# Altium PCB УШЯИ 758727.205.PcbDoc (part 2 of 3)
Units mm, origin at the board's own origin, x right, y up, seen from the top; angles counter-clockwise.
Board outline 230 x 150 mm, 2 copper layers (Top Layer, Bottom Layer), stack 1.57 mm thick; 312 components, 192 nets, 1030 pads, 332 vias.
Unrouted connection lines stored in the file: 2.
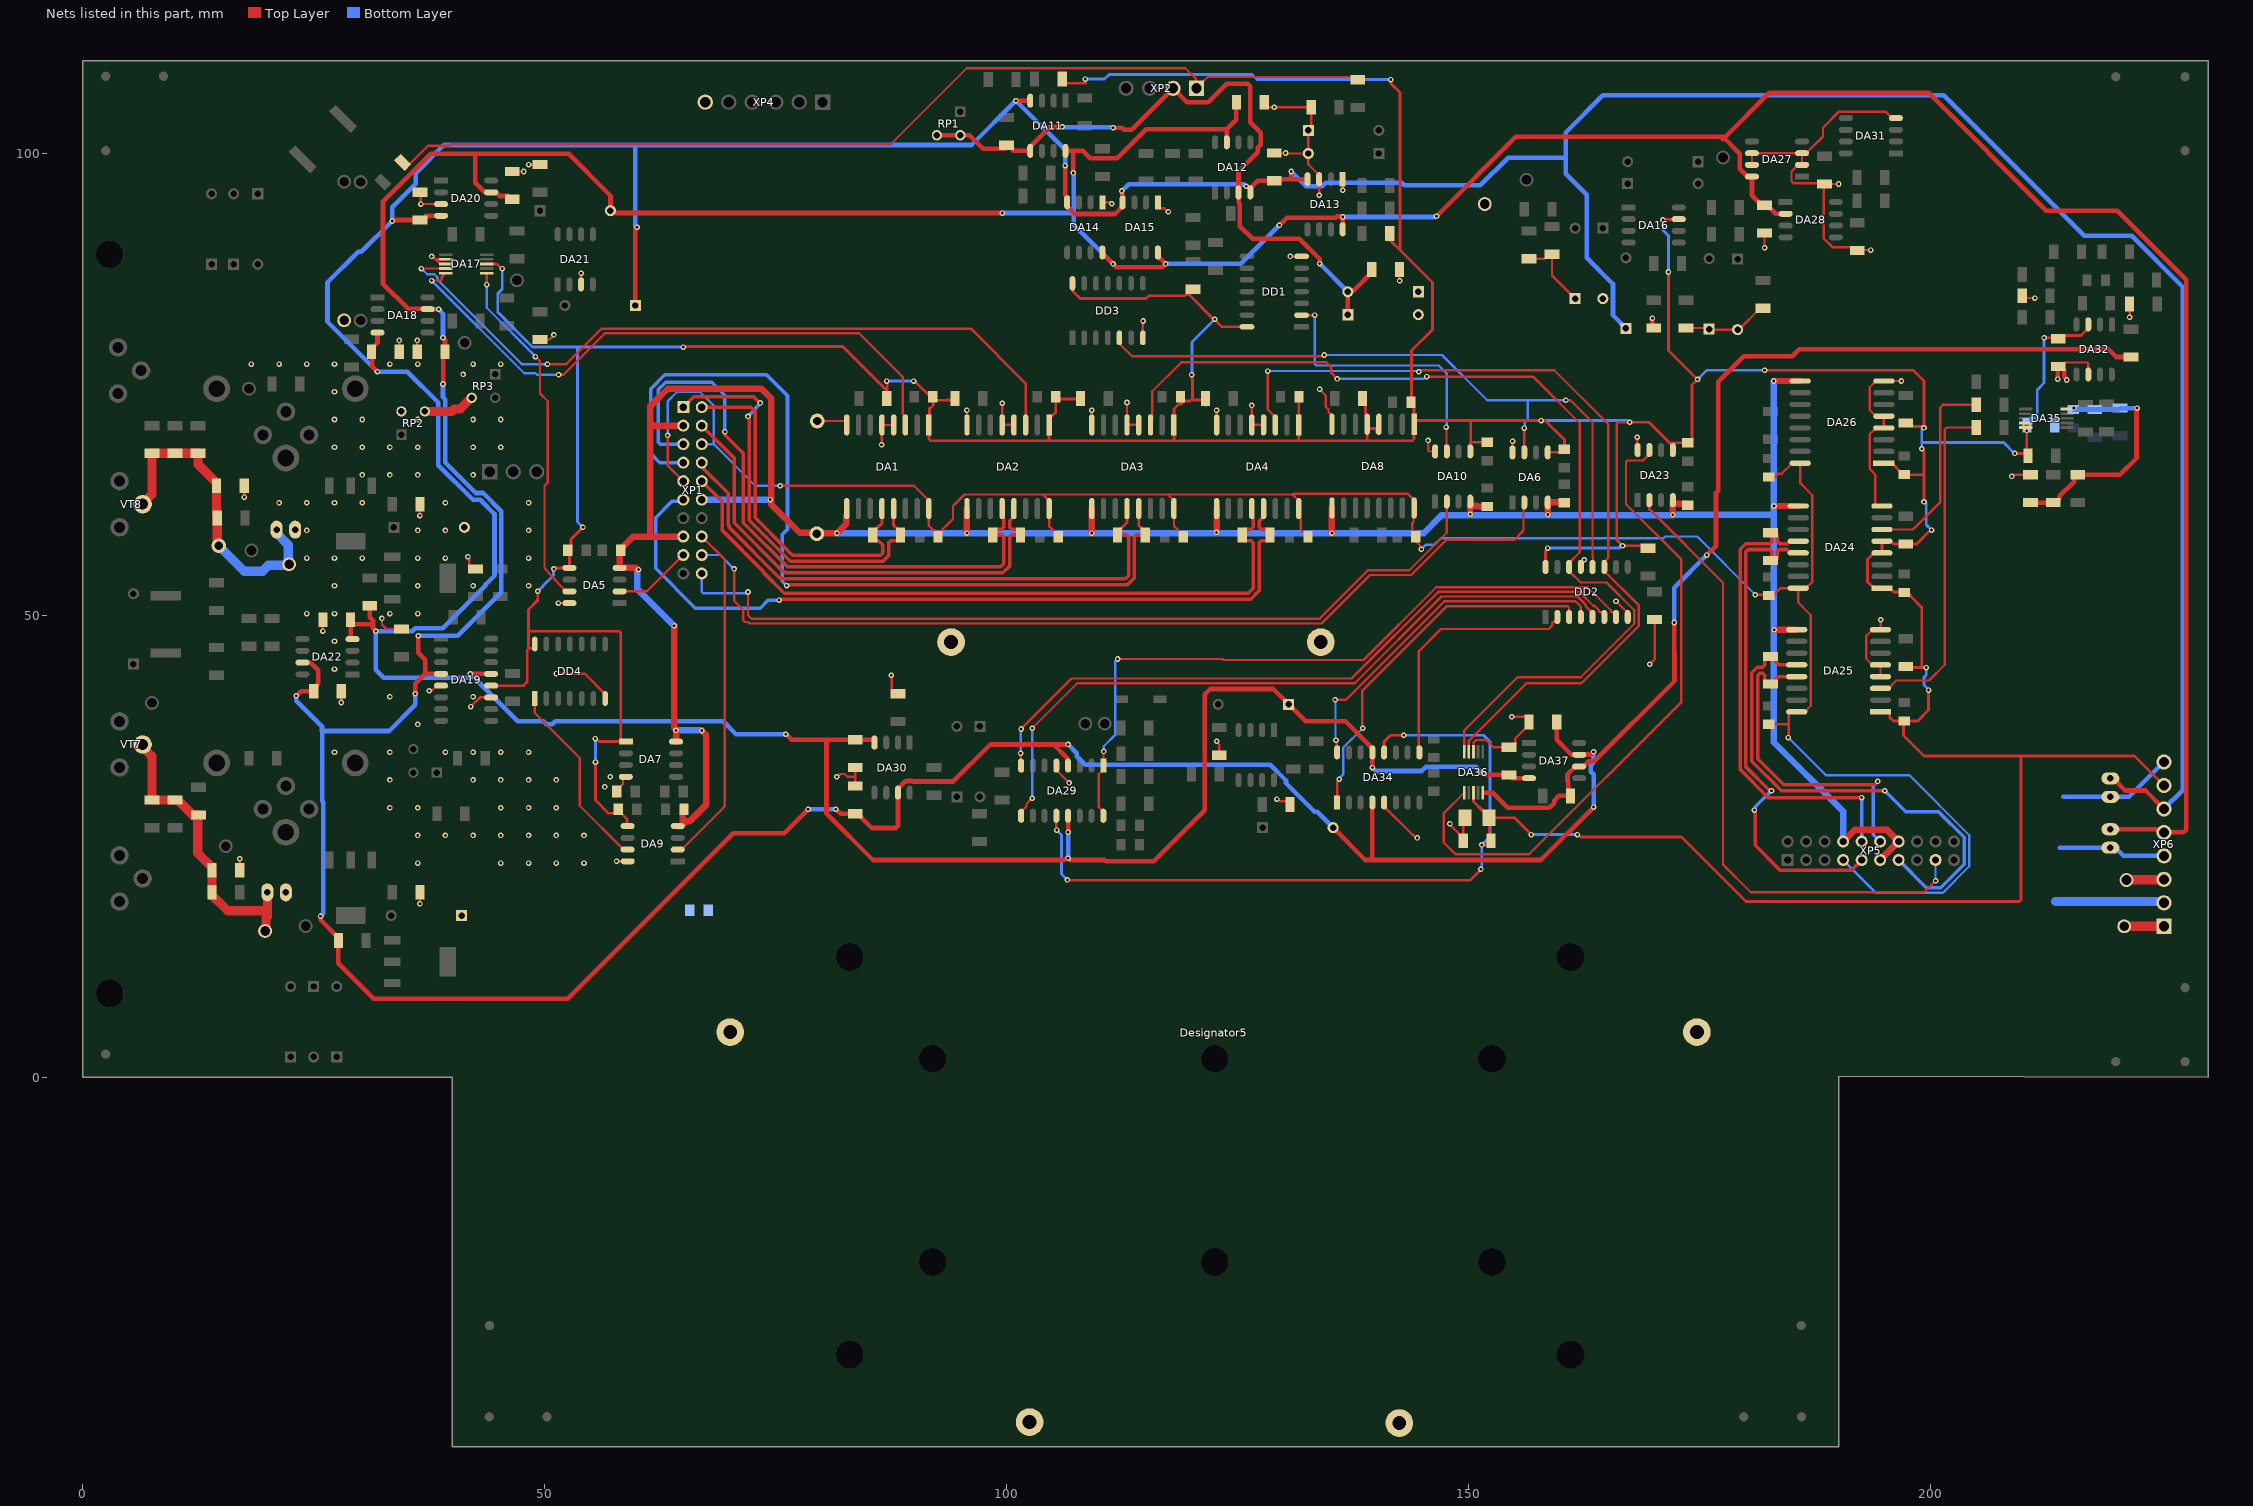
[diagram p2: the nets of this part, all layers, seen from the top]

## Via types
v1: diameter 0.6, hole 0.3, Top Layer to Bottom Layer, 328 vias
v2: diameter 0.5, hole 0.3, Top Layer to Bottom Layer, 3 vias
v3: diameter 1.6, hole 0.9, Top Layer to Bottom Layer, 1 vias

## Nets (pads, with @x,y where several pads share a name; then routed paths per layer and width w, separated by ;. In a path a pad name is that pad's centre, name@x,y a point inside that pad or via, vN(x,y) a via of type N, cw(c..) or ccw(c..) an arc to the next point about the centre after c; other vN are vias at no path point) (continued)
+5: C5.2 C6.2 C7.2 C8.2 C14.1 C15.1 C16.2 C19.1 C20.1 C56.1 C57.2 C58.2 C59.2 C88.1 C94.2 C95.1 C97.1 DA1.1 DA2.1 DA3.1 DA4.1 DA5.5 DA6.5 DA7.1 DA8.1 DA8.4 DA8.5 DA9.5 DA10.5 DA16.7 DA17.8 DA19.12 DA23.5 DA24.1 DA24.4 DA24.5 DA25.1 DA26.1 DA29.12 DA32.3 DA34.12 DA35.9 DA35.10 DA36.8 DD1.14 DD2.16 DD3.14 DD4.14 R5.1 R6.1 R7.1 R8.1 R10.1 R11.2 R19.2 R24.2 R25.1 R60.1 R61.1 R62.1 R88.2 XP6.7 | length 752.8
  Top Layer w0.3: DA17.8@43.725,88 44.666,88 44.693,87.973 44.852,87.973 45.325,87.5 v1(45.406,87.5) ; DA19.12@44.212,42.365 47.706,42.365 48.108,42.767 48.108,46.164 48.363,46.419 ; DD4.14@48.975,46.419 48.363,46.419 ; v1(49.248,52.57) 49.248,51.608 48.245,50.605 48.245,48.25 ; v1(51,54.992) 51.081,54.992 51.2,55.11 DA5.5@52.682,55.11 52.682,56.525 52.657,56.55 52.85,56.743 52.85,58.211 v1(54.139,59.5) ; v1(55.482,36.639) 55.563,36.639 55.888,36.314 58.183,36.314 DA7.1@58.23,36.362 ; v1(55.5,34.099) 55.5,29.972 56.922,28.55 C19.1@58.028,28.55 ; C19.1@57.973,29 57.973,28.875 58.903,27.945 58.903,27.24 DA9.5@58.973,27.17 ; DA7.1@58.788,36.315 58.74,36.362 DA7.1@58.23,36.362 ; v1(65,79) 65.05,79.05 82.254,79.05 87.069,74.235 ; v1(87.015,75.327) 87.069,75.273 87.069,74.235 ; R5.1@87.069,72.782 87.069,74.235 ; v1(89.92,75.327) 89.977,75.27 90.087,75.27 92,73.357 C5.2@92,73.232 ; DA1.1@91.574,70.579 91.574,69.042 91.75,68.865 104.582,68.865 ; DA1.1@91.628,70.579 91.628,72.372 91.705,72.372 92.055,72.722 92.055,72.907 ; C5.2@92.414,73.257 93.459,73.257 93.484,73.282 94.102,73.282 94.452,72.932 R6.1@94.452,72.782 ; C6.2@105.291,73 105.291,71.925 104.944,71.578 104.723,71.578 104.582,71.437 DA2.1@104.582,70.579 104.582,68.865 ; C6.2@105.291,73.019 105.641,73.369 R7.1@107.991,73.369 ; DA29.12@105.365,28.288 105.365,26.793 v1(105.416,26.742) ; R11.2@106.055,107.55 108.555,107.55 108.555,107.945 v1(108.5,108) ; v1(106.566,21.346) 106.612,21.3 150.124,21.3 v1(151.312,22.488) ; DD3.14@107.166,85.45 107.166,85.031 107.948,84.25 115.076,84.25 115.376,84.55 119.254,84.55 119.402,84.699 119.702,84.699 v1@122.497,81.904 ; C7.2@118.799,73.132 118.799,73.007 118.09,72.298 DA3.1@118.09,70.579 118.09,68.92 118.144,68.865 ; 118.853,72.807 119.203,73.157 119.828,73.157 119.953,73.282 120.106,73.282 ; v1(120,76) 120.057,75.943 120.057,75.547 120.106,75.499 120.106,73.282 ; R8.1@121.554,72.682 121.554,72.932 121.204,73.282 120.106,73.282 ; v1(122.5,82) 123.31,81.19 DD1.14@126,81.19 ; DA4.1@131.598,70.129 131.598,68.865 ; DA4.1@131.598,70.579 131.598,72.979 C8.2@131.619,73 ; R10.1@138.536,72.977 138.631,72.977 138.831,72.777 138.831,71.752 139,71.583 DA8.5@139,70.649 DA8.5@139,70.199 ; DA8.4@140.135,69.656 140,69.791 DA8.4@140,70.199 ; DA8.4@140.27,70.649 140.27,70.329 140.14,70.199 DA8.4@140,70.199 ; DA34.12@140.832,35.15 140.832,36.301 141.532,37 v1(142.952,37) ; R19.2@141.5,90.849 141.5,90.549 142.555,89.494 ; v1(141.552,107.948) 141.552,107.553 142.555,106.55 142.555,89.494 ; C16.2@143.749,73.029 143.749,72.634 143.804,72.579 144.055,72.579 144.08,72.554 DA8.1@144.08,71.05 ; C16.2@143.804,73.029 143.804,78.621 146.055,80.872 146.055,85.994 142.555,89.494 ; DA8.1@144.08,70.649 144.08,69.041 143.904,68.865 139,68.865 ; DA8.1@144.08,70.909 144.221,71.05 150.21,71.05 ; DA10.5@150.155,67.712 150.155,68.712 150.21,68.712 ; DA36.8@150.5,30.775 150.5,29.834 151.501,28.833 151.65,28.833 152.2,28.283 C95.1@152.2,28.083 ; v1(151.4,25.133) 152.05,25.133 152.4,25.483 C97.1@152.4,25.583 152.2,25.783 C95.1@152.2,28.083 ; C20.1@152,68.712 150.21,68.712 ; v1(156.75,26.25) 154.917,28.083 C95.1@152.2,28.083 ; DD2.16@158.305,55.25 158.305,56.936 158.538,57.169 v1(158.538,57.25) ; DA6.5@158.538,67.612 160.005,67.612 C15.1@160.338,67.945 160.338,68.968 158.256,71.05 v1(157.811,71.05) 150.21,71.05 ; v1(161.75,26.25) 161.826,26.25 162.076,26 173,26 180,19 209.574,19 209.75,19.176 209.75,34.75 ; R25.1@169.375,57.225 169.1,57.5 v1(166.627,57.5) 166,58.127 166,70.689 166.176,70.865 v1(167.418,70.865) 169.507,70.865 171.722,68.65 ; v1(171,92.75) 171.046,92.796 172.665,92.796 DA16.7@172.712,92.843 ; v1(171.6,87.125) 171.6,78.65 v1(174.75,75.5) 174.143,74.893 174.143,69 C56.1@173.793,68.65 ; DA23.5@172.073,67.862 172.073,68.3 171.722,68.65 ; C56.1@173.668,68.65 171.722,68.65 ; v1(182,76.5) 198.08,76.5 199.25,75.33 v1(199.25,70.258) 199.169,70.258 199.027,70.401 198.152,70.401 197.802,70.751 197.299,70.751 R62.1@197.275,70.775 ; DA25.1@194.536,39.53 195.394,39.53 195.535,39.389 195.535,38.951 195.956,38.53 C57.2@197.031,38.53 ; DA26.1@194.907,66.44 195.765,66.44 196.66,65.545 197.305,65.545 197.655,65.195 199.136,65.195 199.25,65.08 ; C59.2@197.5,52.45 197.45,52.5 195.971,52.5 195.555,52.916 DA24.1@194.698,52.916 193.84,52.916 193.149,53.607 193.149,56.034 193.84,56.726 DA24.4@194.698,56.726 DA24.5@194.698,57.996 195.632,57.996 195.937,57.691 197.666,57.691 R60.1@197.675,57.7 ; C59.2@197.513,52.45 197.826,52.137 197.826,52.025 199,50.851 199,44.32 ; R61.1@197.6,44.45 197.73,44.32 199,44.32 ; 198.168,57.7 198.468,57.7 199.968,59.2 v1(200.074,59.2) ; v1(199,68.001) 199,67.92 199.25,67.67 199.25,65.195 199.25,65.08 ; v1(199.25,62.25) 199.25,65.08 ; v1(199.499,44.32) 199,44.32 ; v1(199.749,41.884) 199.749,39.721 198.578,38.55 197.381,38.55 197.031,38.2 197.031,36.969 199.25,34.75 209.75,34.75 ; v1(209.064,67.5) R88.2@210.25,67.5 ; DA35.9@210.275,70.796 DA35.10@210.275,70.296 210.375,70.296 210.375,67.625 R88.2@210.25,67.5 ; R88.2@210.345,67.595 210.5,67.441 R88.2@210.5,67.25 210.405,67.345 R88.2@210.25,67.5 ; v1(212.25,80) 213.666,80 C88.1@213.768,79.897 214.118,80.247 216.252,80.247 217.029,81.024 DA32.3@217.029,81.462 ; XP6.7@225.209,31.567 222.026,34.75 209.75,34.75 ; 48.245,48.25 48.245,46.419 48.363,46.419 ; 48.245,48.25 58.054,48.25 58.23,48.074 DA7.1@58.23,36.362 ; 104.582,68.865 118.144,68.865 ; 118.144,68.865 131.598,68.865 ; 131.598,68.865 139,68.865 ; 139,68.865 DA8.5@139,70.199 ; DA8.5@139,70.199 DA8.4@140,70.199 ; 150.21,68.712 150.21,71.05
  Bottom Layer w0.3: v1(45.406,87.5) 45.406,85.298 44.925,84.817 44.925,82.796 48.701,79.02 52.624,79.02 52.644,79 63.813,79 v1(65,79) ; v1(49.248,52.57) 49.787,53.109 49.787,53.135 50.943,54.291 50.943,54.934 v1(51,54.992) ; 53.555,78.894 53.555,60.085 v1(54.139,59.5) ; v1(55.5,34.099) v1@55.5,36.622 ; v1(87.015,75.327) v1(89.92,75.327) ; v1(105.416,26.742) 105.416,26.72 105.935,26.201 105.935,21.977 v1(106.566,21.346) ; v1(108.5,108) 110.586,108 111.086,108.5 126.528,108.5 127.08,107.948 v1(141.552,107.948) ; v1@120.055,76 120.055,79.555 v1(122.5,82) ; v1(142.952,37) 151.571,37 152.278,36.292 152.278,26.011 v1(151.4,25.133) v1@151.4,22.576 ; v1(156.75,26.25) v1(161.75,26.25) ; v1(157.811,71.05) 167.151,71.05 167.336,70.865 v1(167.418,70.865) ; v1(158.538,57.25) 166.296,57.25 166.546,57.5 v1(166.627,57.5) ; v1(171,92.75) 171,91.646 171.6,91.046 v1(171.6,87.125) ; v1(174.75,75.5) 175.75,76.5 v1(182,76.5) ; v1(199,68.001) 199,68.689 ; v1(199.25,62.25) 199.5,62 199.5,59.774 v1(200.074,59.2) ; v1(199.25,70.258) 199,70.008 199,68.689 ; v1(199.499,44.32) 199.499,43.52 199.25,43.27 199.25,42.446 199.749,41.946 v1(199.749,41.884) ; v1(209.064,67.5) 207.875,68.689 199,68.689 ; C94.2@210.4,70.55 210.75,70.9 210.75,71.326 211.324,71.326 211.5,71.502 211.5,74.373 212.25,75.123 v1(212.25,80)
  other v2: 210.375,69.95
+5n: C1.2 C2.2 C3.2 C4.2 C10.2 C53.2 C54.2 C55.2 DA1.16 DA2.16 DA3.16 DA4.16 DA8.16 DA24.16 DA25.16 DA26.16 XP1.6 XP1.9 XP5.7 | length 253.8
  Top Layer w0.254: v1(63.3,69.445) 63.3,66.2 XP1.9@65,64.5 ; v1(75.5,64) 89.955,64 91.574,62.381 DA1.16@91.574,61.523 91.574,59.67 92.076,59.168 92.201,59.168 C1.2@92.574,58.795 ; C1.2@92.574,58.67 C1.2@92.574,58.795 ; C2.2@105.582,58.5 105.582,58.625 104.582,59.625 DA2.16@104.582,61.523 104.582,62.381 103.914,63.049 ; C3.2@119.09,58.5 119.09,58.625 118.09,59.625 DA3.16@118.09,61.523 118.09,62.381 117.422,63.049 ; C4.2@132.598,58.5 132.598,58.625 132.225,58.998 132.1,58.998 131.804,59.294 131.804,60.371 131.598,60.577 DA4.16@131.598,61.523 131.598,62.381 130.93,63.049 ; v1(144.873,57.127) 144.807,57.193 144.807,57.443 144.258,57.992 144.258,58.915 143.885,59.288 143.885,59.936 144.017,60.068 144.017,61.53 DA8.16@144.08,61.593 144.08,62.451 143.412,63.119 130.999,63.119 130.93,63.049 ; v1(181,52.207) 182.702,52.207 C53.2@182.788,52.121 ; C54.2@182.74,38.176 184.547,38.176 184.626,38.097 ; C53.2@182.913,52.121 183.708,52.916 DA24.16@185.642,52.916 ; 183.127,64.933 183.5,65.306 183.859,65.306 184.993,66.44 DA26.16@185.851,66.44 185.851,64.278 187.167,62.962 187.167,53.584 186.499,52.916 DA24.16@185.642,52.916 ; v1(184.56,36.75) 184.626,36.816 184.626,38.097 ; C1.2@92.574,58.795 94.181,60.403 94.181,61.815 95.415,63.049 103.914,63.049 ; 103.914,63.049 117.422,63.049 ; 117.422,63.049 130.93,63.049 ; 184.626,38.097 184.626,39.379 184.777,39.53 DA25.16@185.48,39.53 186.338,39.53 187.006,40.198 187.006,49.993 185.641,51.358 DA24.16@185.642,52.916
  Bottom Layer w0.254: v1(63.3,69.445) 63.3,73.127 64.35,74.177 66.775,74.177 68.286,72.666 68.286,68.5 ; XP1.6@67,68.5 68.286,68.5 ; v1(75.5,64) 72.786,64 68.286,68.5 ; v1(144.873,57.127) 145.374,57.627 146.285,57.627 146.98,58.323 171.066,58.323 171.243,58.5 174.707,58.5 v1(181,52.207) ; v1(184.56,36.75) 188.633,32.677 197.668,32.677 204.158,26.187 204.158,22.813 201.287,19.942 194.058,19.942 XP5.7@190.5,23.5
+15: C26.2 C35.1 C42.1 C46.2 C60.1 C67.2 C79.2 C98.1 DA11.8 DA12.7 DA13.8 DA14.8 DA15.8 DA18.7 DA19.4 DA20.7 DA22.7 DA27.8 DA28.2 DA29.4 DA30.7 DA34.4 DA37.7 R42.1 VD10.2 VD25.2 XP6.5 | length 646.8
  Top Layer w0.5: v1(23.121,41.27) 23.181,41.27 23.681,41.77 C42.1@25,41.77 25,42.07 25.5,42.57 25.5,44.035 24.696,44.839 23.814,44.839 DA22.7@23.788,44.865 ; v1(25.75,17.424) 25.769,17.405 25.769,17.009 27.678,15.1 R42.1@27.678,14.8 27.678,12.322 31.5,8.5 52.5,8.5 70.412,26.412 75.912,26.412 v1(78.5,29) ; v1(36,41.5) 36,42.573 37.062,43.635 ; v1(36.323,47.77) 36.304,47.751 36.304,45.926 37.062,45.168 37.062,43.635 ; v1(38.55,83.104) DA18.7@37.33,83.104 37.301,83.133 35.217,83.133 32.5,85.849 32.5,94.719 37.681,99.9 42.5,99.9 ; DA19.4@38.788,43.635 37.062,43.635 ; v1(39,75.005) 39.019,75.025 39.019,78.307 C35.1@39.212,78.5 39.212,79.788 v1(39,80) ; C46.2@46.5,95 46.5,94.926 46.076,95.35 45.139,95.35 44.744,95.745 DA20.7@44.212,95.745 44.183,95.774 43.516,95.774 42.5,96.79 42.5,99.9 ; v1(81.5,29) 81.527,29 82.026,28.501 C79.2@83.595,28.501 83.895,28.501 84.245,28.151 84.245,28.1 85.383,26.962 87.962,26.962 88.23,27.23 DA30.7@88.23,30.789 88.23,31.226 89.004,32 89.107,32 89.158,32.051 89.842,32.051 89.893,32 94.195,32 98.195,36 105.054,36 ; v1(99.5,93.506) 57.764,93.506 57.647,93.622 57.255,93.622 VD10.2@57.121,93.756 57.121,95.379 52.6,99.9 42.5,99.9 ; DA11.8@106.351,100.236 107.196,100.236 ; DA29.4@106.635,33.712 106.606,33.741 106.606,34.448 105.054,36 ; v1(106.635,36) 105.054,36 ; v1(107.196,97.846) 107.196,100.236 ; DA14.8@110.351,89.236 110.351,88.839 110.42,88.77 110.73,88.77 v1(111.5,88) 111.851,87.649 116.844,87.649 v1(117.196,88) 117.172,88 DA15.8@116.351,88.822 ; DA12.7@123.811,101.16 123.811,102.573 ; C26.2@124.851,105.5 124.851,103.613 123.811,102.573 ; v1(129.5,92.174) 130.325,92.999 135.585,92.999 135.716,93.129 136.268,93.129 136.323,93.074 v1(136.351,93.074) ; VD25.2@135.313,27 138.813,23.5 139.562,23.5 ; DA13.8@136.351,91.736 v1@136.351,93.129 ; DA34.4@139.562,29.726 139.562,23.5 ; v1(146.5,93.162) 155.088,101.75 177.77,101.75 ; C98.1@159.5,38.437 159.5,36.5 161.084,34.916 161.909,34.916 DA37.7@161.937,34.888 161.966,34.916 163.177,34.916 163.473,35.213 v1(163.5,35.213) ; v1(163.5,29.224) 157.776,23.5 139.562,23.5 ; DA28.2@184.283,93.42 184.254,93.448 183.197,93.448 182.3,94.345 C67.2@182,94.345 181.7,94.345 180.634,95.412 DA27.8@180.634,97.44 180.196,97.44 179.334,98.303 179.334,99.916 177.77,101.48 177.5,101.48 177.635,101.615 177.77,101.75 ; C60.1@219.415,26.827 224.341,26.827 224.461,26.707 224.989,26.707 XP6.5@225.209,26.487 227.316,26.487 227.609,26.78 227.609,86.282 220.141,93.75 212.5,93.75 199.75,106.5 182.52,106.5 177.77,101.75 ; 107.196,100.236 108.262,100.236 108.29,100.208 109.05,99.448 111.956,99.448 115.081,102.573 123.811,102.573
  Bottom Layer w0.5: v1(23.121,41.27) 23.121,40.73 25.9,37.95 25.9,37.456 33.162,37.456 36,40.294 v1(36,41.5) ; v1(25.75,17.424) 25.75,17.451 26.025,17.726 26.025,29.775 25.95,29.85 25.95,37.456 ; v1(36.323,47.77) 40.596,47.77 45.316,52.49 45.316,61.245 43.347,63.213 42.551,63.213 39.25,66.514 39.25,73.311 39,73.561 v1(39,75.005) ; v1(38.55,83.104) 38.55,83.077 39,82.627 v1(39,80) ; v1(78.5,29) v1(81.5,29) ; v1(99.5,93.506) 107.241,93.506 ; v1(106.635,36) 107.581,35.054 107.581,34.729 108.508,33.802 128.511,33.802 130.211,32.102 130.211,31.789 133.299,28.701 133.612,28.701 VD25.2@135.313,27 ; v1(107.196,97.846) 107.241,97.801 107.241,93.506 ; v1(111.5,88) 107.241,92.259 107.241,93.506 ; v1(117.196,88) 125.326,88 v1(129.5,92.174) ; v1(136.351,93.074) 146.385,93.074 146.473,93.162 v1(146.5,93.162) ; v1(163.5,29.224) 163.5,32.756 163.2,33.056 163.2,33.719 163.481,34 163.481,35.193 v1(163.5,35.213)
+55: 5.1 6.1 C50.2 C63.1 R45.1 R49.2 R52.2 R54.2 VT7.2 XP6.1 | length 37.9
  Top Layer w1: VT7.2@6.5,36 6.5,35.729 7.5,34.729 R54.2@7.5,30 R52.2@10.3,30 ; R52.2@10,30 R52.2@10.3,30 ; R45.1@14,20 R45.1@14,19.7 ; C50.2@14,22.4 C50.2@14,22.1 ; 5.1@19.75,15.82 19.846,15.915 19.846,17.224 20,17.379 20,18 ; C63.1@20,20 20,18 ; 6.1@220.915,16.327 XP6.1@225.209,16.327 ; R52.2@10.3,30 12.088,28.212 12.25,28.375 R49.2@12.55,28.375 12.463,28.375 12.463,24.237 14,22.7 C50.2@14,22.1 ; R45.1@14,19.7 15.7,18 20,18 ; R45.1@14,19.7 C50.2@14,22.1
-15: C27.2 C36.2 C43.1 C47.2 C62.2 C80.2 C99.2 DA11.4 DA12.4 DA13.4 DA14.4 DA15.4 DA18.4 DA19.13 DA20.4 DA22.4 DA29.13 DA30.4 DA34.13 DA37.4 R44.1 VD7.1 VD11.1 VD26.1 XP6.6 | length 595.3
  Top Layer w0.5: C43.1@29,49.5 C43.1@29,49.2 ; DA22.4@29.212,47.405 29.162,47.405 29,47.567 C43.1@29,49.2 ; R44.1@31.072,51 31.072,49.777 31.42,49.43 31.42,49 ; v1(31.727,48.25) 31.727,48.331 31.515,48.543 31.515,48.557 31.42,48.557 31.42,49 ; v1(31.906,76.35) 31.906,76.377 31.333,76.95 31.333,78.421 C36.2@31.254,78.5 31.254,78.8 31.906,79.452 DA18.4@31.906,80.564 ; v1(33.5,92.645) 33.527,92.645 33.627,92.745 C47.2@36.5,92.745 ; C47.2@36.8,92.745 C47.2@37.15,93.095 ; DA20.4@38.788,93.205 37.46,93.205 ; v1(41.945,43.635) DA19.13@44.212,43.635 ; VD11.1@59.813,83.5 59.813,91.692 60,91.879 v1(60,91.974) ; v1(76.094,37.101) 76.121,37.101 76.721,36.501 80.5,36.501 ; DA30.4@85.69,36.213 85.69,36.339 85.528,36.501 C80.2@83.595,36.501 80.5,36.501 ; v1(100.986,105.66) DA11.4@102.541,105.66 ; v1(106.311,98.646) 106.311,95.422 106.541,95.193 DA14.4@106.541,94.66 106.541,94.223 107.366,93.398 111.716,93.398 112.541,94.223 DA15.4@112.541,94.66 112.512,94.689 112.512,95.788 112.437,95.863 v1(112.437,95.89) ; v1(106.635,26.5) DA29.13@106.635,28.288 ; DA12.4@126.351,96.174 127.177,97 C27.2@128.946,97 129.106,97.16 130.782,97.16 ; v1(130.782,98) 130.782,97.16 ; DA13.4@132.541,97.16 130.782,97.16 ; v1(139.562,33.5) DA34.13@139.562,35.15 139.562,35.588 136.65,38.5 132.35,38.5 VD26.1@130.503,40.347 128.85,42 121.999,42 121.417,41.418 121.417,28.896 115.894,23.373 110.74,23.373 110.613,23.5 106.839,23.5 106.662,23.677 v1(106.635,23.677) 106.616,23.658 106.385,23.658 106.227,23.5 85.525,23.5 80.5,28.525 80.5,36.501 ; v1(151.5,32.887) 151.527,32.887 151.692,32.722 154.324,32.722 C99.2@154.34,32.706 154.69,32.356 155.292,32.356 155.301,32.348 DA37.4@156.513,32.348 ; C62.2@219.415,32.327 219.74,32.327 221.05,31.017 223.219,31.017 XP6.6@225.209,29.027 ; C43.1@29,49.2 29.2,49 31.42,49 ; C47.2@37.15,93.095 37.15,93.205 37.46,93.205 ; C47.2@37.15,93.095 37.35,93.095 37.46,93.205
  Bottom Layer w0.5: v1@59.813,91.974 59.813,100.676 60,100.863 ; v1(76.094,37.101) 70.7,37.101 69.301,38.5 51.131,38.5 50.831,38.2 50.169,38.2 49.869,38.5 47.08,38.5 v1(41.945,43.635) 41.919,43.609 41.919,43.2 32.6,43.2 31.727,44.073 v1(31.727,48.25) 35.672,48.25 35.992,48.57 38.961,48.57 43.602,53.211 43.602,53.313 44.566,54.277 44.566,60.934 43.037,62.463 42.24,62.463 38.5,66.203 38.5,73 35.15,76.35 v1(31.906,76.35) 26.5,81.756 26.5,86 29.806,89.306 30.161,89.306 v1(33.5,92.645) 33.5,94.122 36.031,96.653 36.031,97.81 39.084,100.863 60,100.863 ; v1(106.311,98.646) 106.311,100.335 101.486,105.16 v1(100.986,105.66) 96.188,100.863 60,100.863 ; v1(106.635,23.677) v1(106.635,26.5) ; v1(112.437,95.89) 113.185,96.638 125.666,96.638 125.896,96.408 v1(125.924,96.408) ; v1(130.782,98) 132.378,96.404 134.139,96.404 134.506,96.771 142.743,96.771 143.013,96.5 151.25,96.5 154.25,99.5 160.472,99.5 ; v1(139.562,33.5) 139.935,33.127 144.897,33.127 145.37,33.6 150.76,33.6 151.473,32.887 v1(151.5,32.887) ; VD7.1@167,81.032 165.6,82.432 165.6,85.82 162.75,88.67 162.75,95.5 160.472,97.778 160.472,99.5 ; XP6.6@225.209,29.027 227.25,31.068 227.25,85.504 221.726,91.028 216.609,91.028 201.387,106.25 164.5,106.25 160.472,102.222 160.472,99.5
-55: 3.1 4.1 C51.1 C61.2 R48.1 R50.1 R53.1 R55.1 VT8.2 XP6.3 | length 39.5
  Top Layer w1: VT8.2@6.357,61.857 6.357,61.942 7.5,63.086 R53.1@7.5,67.5 R55.1@10,67.5 R50.1@12.5,67.5 12.5,66.3 14.5,64.3 C51.1@14.5,64 14.5,60.873 14.573,60.8 R48.1@14.573,60.5 14.573,57.834 14.744,57.662 v3(14.744,57.5) ; 4.1@221.163,21.327 221.203,21.367 225.169,21.367 XP6.3@225.209,21.407
  Bottom Layer w1: v3(14.744,57.5) 17.494,54.75 19.465,54.75 20.119,55.404 22.254,55.404 3.1@22.35,55.5 22.254,55.596 22.254,57.59 21,58.844 C61.2@21,59.25
ADC: C96.2 DA36.10 DA37.6 R78.1 | length 109.3
  Top Layer w0.5: 151.75,30.775 152.575,30.775 154.213,29.137 158.707,29.137 159.229,29.659 159.229,29.916 159.75,30.437 C96.2@161,30.437 160.75,30.687 160.75,31.931 160.675,32.006 160.675,32.793 DA37.6@161.5,33.617 ; DA37.6@161.937,33.618 162.415,33.618 162.964,34.166 163.585,34.166 172.25,42.831 172.25,45.99 172.225,46.015 v1(172.225,49.2) ; v1(175.75,56.5) 176.75,57.5 176.75,63.223 177,63.473 177,75.25 179.75,78 184.993,78 185.743,78.75 219.214,78.75 220.034,77.93 R78.1@221.663,77.93
  Bottom Layer w0.5: v1(172.225,49.2) 172.225,52.975 v1(175.75,56.5)
CLK_ADU: DA25.3 R89.2 | length 36.9
  Top Layer w0.254: DA25.3@194.536,42.07 195.394,42.07 196.252,42.929 199.794,42.929 201.5,44.634 201.5,70.046 201.75,70.296 R89.2@204.895,70.296
CLK_ADU+: DA25.12 R58.1 XP5.13 | length 54.8
  Top Layer w0.381: DA25.12@185.48,44.61 183.547,44.61 183.237,44.921 183.237,45.221 182.927,45.53 182.327,45.53 182.018,45.221 182.018,44.571 181.795,44.348 181.216,44.348 180.615,43.747 180.615,34.203 183.827,30.99 194.991,30.99 v1(195,31)
  Bottom Layer w0.381: v1(195,31) 197.281,28.719 200.823,28.719 203.591,25.952 203.591,23.048 201.052,20.51 199.49,20.51 XP5.13@196.5,23.5
CLK_ADU-: DA25.13 R58.2 XP5.12 | length 36.1
  Top Layer w0.381: DA25.13@185.48,43.34 183.46,43.34 183.237,43.117 183.237,42.84 182.927,42.53 182.327,42.53 182.018,42.84 182.018,43.49 181.795,43.713 181.479,43.713 181.25,43.484 181.25,34.466 184.09,31.625 193.875,31.625 v1(194.25,32)
  Bottom Layer w0.381: v1(194.25,32) 193.75,31.5 193.75,26.25 XP5.12@194.5,25.5
CLK_DA1: DA2.3 DA17.4 | length 81
  Top Layer w0.254: v1(36.663,87.5) DA17.4@39.275,87.5 ; v1(50.3,77.154) 52.334,77.154 56.18,81 96.117,81 102.042,75.075 DA2.3@102.042,70.579
  Bottom Layer w0.254: v1(36.663,87.5) 37.286,86.877 38.048,86.877 38.445,86.48 38.445,86.236 47.526,77.154 v1(50.3,77.154)
CLK_DA1+: DA2.12 R2.1 XP1.5 | length 69.5
  Top Layer w0.381: v1(69.5,69.85) 69.542,69.808 69.542,69.458 71.5,67.5 71.5,60 76.294,55.206 99.309,55.206 99.676,55.573 99.676,58.447 99.453,58.67 R2.1@98.494,58.67 98.494,58.971 98.803,59.28 99.453,59.28 99.676,59.503 99.676,60.437 99.502,60.611 DA2.12@99.502,61.523
  Bottom Layer w0.381: XP1.5@65,68.5 62.523,68.5 62.3,68.723 62.3,74.408 63.094,75.201 68.076,75.201 69.5,73.777 v1(69.5,69.85)
CLK_DA1-: DA2.13 R2.2 XP1.4 | length 52.6
  Top Layer w0.381: XP1.4@67,70.5 70.5,67 70.5,60 75.722,54.778 75.824,54.778 76.031,54.571 99.572,54.571 100.311,55.31 100.311,58.447 100.534,58.67 R2.2@101.494,58.67 101.494,58.971 101.184,59.28 100.534,59.28 100.311,59.503 100.311,60.199 100.772,60.659 DA2.13@100.772,61.523
CLK_RgDU: DA4.3 DA36.4 DD2.11 | length 93.8
  Top Layer w0.254: v1(128.25,76.409) 128.25,72.245 129.058,71.437 DA4.3@129.058,70.579 ; v1(144.591,76.323) 144.591,76.341 144.75,76.5 159.25,76.5 165.101,70.649 165.101,56.202 164.655,55.756 DD2.11@164.655,55.212 164.655,54.775 168.401,51.029 168.401,48.851 162.176,42.626 156.229,42.626 150.004,36.401 150.004,36.36 149.973,36.329 149.973,35.252 DA36.4@150,35.225
  Bottom Layer w0.254: v1(128.25,76.409) v1@144.405,76.409 ; v1@144.5,76.409 144.586,76.323 v1(144.591,76.323)
CLK_RgDU+: DA4.12 R4.1 XP1.10 | length 77.2
  Top Layer w0.381: XP1.10@67,64.5 69.238,62.262 69.238,59.154 73.631,54.761 73.631,54.669 75.939,52.361 126.126,52.361 126.664,52.898 126.664,57.838 126.441,58.061 125.791,58.061 125.481,58.37 R4.1@125.481,58.67 125.481,58.97 125.791,59.28 126.441,59.28 126.664,59.503 126.664,60.465 126.48,60.649 DA4.12@126.48,61.486
CLK_RgDU-: DA4.13 R4.2 XP1.11 | length 88.2
  Top Layer w0.381: v1(75.368,51.629) 75.41,51.671 75.565,51.671 75.619,51.726 126.389,51.726 127.299,52.635 127.299,57.838 127.522,58.061 128.172,58.061 128.481,58.37 R4.2@128.481,58.67 128.481,58.97 128.172,59.28 127.522,59.28 127.299,59.503 127.299,60.17 127.788,60.659 DA4.13@127.788,61.749
  Bottom Layer w0.381: XP1.11@65,62.5 64.826,62.326 63.778,62.326 62,60.547 62,55.065 66.306,50.76 73.307,50.76 74.176,51.629 v1(75.368,51.629)
DAT_ADU: DA24.6 R90.2 | length 21.8
  Top Layer w0.254: DA24.6@194.698,59.266 198.074,59.266 200.996,62.188 200.996,70.254 201,70.258 201,72.46 201.29,72.75 R90.2@204.895,72.75
DAT_ADU+: DA24.12 R57.1 XP5.10 | length 51.6
  Top Layer w0.381: DA24.12@185.642,57.996 184.729,57.996 184.467,57.733 183.621,57.733 183.398,57.956 183.398,58.606 183.088,58.916 182.788,58.916 182.788,57.956 182.565,57.733 179.96,57.733 179.349,57.122 179.349,33.293 182.392,30.25 v1(192.5,30.25)
  Bottom Layer w0.381: XP5.10@192.5,25.5 v1(192.5,30.25)
DAT_ADU-: DA24.13 R57.2 XP5.9 | length 54.7
  Top Layer w0.381: v1(180.902,28.902) 180.902,28.843 181,28.745 181,25.077 183.668,22.409 191.41,22.409 XP5.9@192.5,23.5 ; v1(182.75,31) 182.708,31.042 182.498,31.042 179.984,33.556 179.984,56.859 180.223,57.098 182.565,57.098 182.788,56.875 182.788,55.916 183.088,55.916 183.398,56.225 183.398,56.875 183.621,57.098 184.405,57.098 184.777,56.726 DA24.13@185.642,56.726
  Bottom Layer w0.381: v1(180.902,28.902) 180.902,28.962 181,29.059 181,29.25 v1(182.75,31)
DAT_DA1: DA1.3 DA17.5 | length 66.3
  Top Layer w0.254: v1(37.768,86.2) 38.726,86.2 38.874,86.349 38.874,86.599 DA17.5@39.275,87 ; v1(51.5,76) 52.023,76 56.519,80.496 84.004,80.496 88.743,75.757 88.743,71.75 89.034,71.459 DA1.3@89.034,70.579
  Bottom Layer w0.254: v1(37.768,86.2) 47.791,76.177 48.997,76.177 49.174,76 v1(51.5,76)
DAT_DA1+: DA1.12 R1.1 XP1.2 | length 38.9
  Top Layer w0.318: R1.1@85.5,58.67 85.5,58.97 86.201,59.672 86.269,59.672 86.494,59.897 DA1.12@86.494,61.523
  Top Layer w0.381: XP1.2@67,72.5 70.188,72.5 72.3,72.5 72.766,72.034 72.766,60.524 76.145,57.145 76.59,56.701 ; 76.595,56.695 76.818,56.472 86.352,56.472 86.575,56.695 86.575,57.596 86.11,58.061 85.81,58.061 85.5,58.37 R1.1@85.5,58.67
DAT_DA1-: DA1.13 R1.2 XP1.1 | length 45.6
  Top Layer w0.318: DA1.13@87.764,61.523 87.764,59.707 R1.2@88.5,58.97
  Top Layer w0.381: XP1.1@65,72.5 66.125,73.625 72.603,73.625 73.27,72.958 v1(73.329,72.958) ; v1(72,71.5) 72.042,71.458 72.042,71.303 72.131,71.214 72.131,60.261 75.696,56.696 76.146,56.246 76.555,55.837 86.615,55.837 87.21,56.432 87.21,57.838 87.433,58.061 88.191,58.061 88.5,58.37 R1.2@88.5,58.67
  Bottom Layer w0.381: v1(72,71.5) 72.841,72.341 72.841,72.411 73.329,72.899 v1(73.329,72.958)
DAT_RgDU: DA3.3 DA36.5 DD2.14 | length 106
  Top Layer w0.254: DA3.3@115.75,71.25 115.75,74.212 118.885,77.348 134.563,77.348 135.123,76.787 135.123,76.188 v1(135.75,75.561) ; v1(145.435,75.805) 156.945,75.805 162,70.75 162,56.805 160.845,55.65 DD2.14@160.845,55.212 160.845,54.775 162.099,53.52 164.893,53.52 167.897,50.516 167.897,49.06 162.117,43.28 155.28,43.28 149.5,37.5 DA36.5@149.5,35.225
  Bottom Layer w0.254: v1(135.75,75.561) 145.097,75.561 145.342,75.805 v1(145.435,75.805)
DAT_RgDU+: DA3.12 R3.1 XP1.8 | length 62.6
  Top Layer w0.318: R3.1@111.993,58.67 112.334,59.011 112.334,59.334 113.01,60.01 DA3.12@113.01,61.523
  Top Layer w0.381: XP1.8@67,66.5 67.176,66.324 67.176,65.866 69.869,63.173 69.869,59.739 70,59.608 70,59.442 75.392,54.05 75.66,54.05 75.77,53.94 112.843,53.94 113.176,54.273 113.176,58.447 112.953,58.67 R3.1@111.993,58.67
DAT_RgDU-: DA3.13 R3.2 XP1.7 | length 95.1
  Top Layer w0.318: DA3.13@114.28,61.523 114.28,59.684 114.993,58.97 R3.2@114.993,58.67 R3.2@114.993,58.653
  Top Layer w0.381: v1(76.175,53.2) 76.217,53.241 76.372,53.241 76.435,53.305 113.106,53.305 113.811,54.01 113.811,58.447 114.034,58.67 R3.2@114.993,58.67
  Bottom Layer w0.381: XP1.7@65,66.5 62.46,66.5 61.5,67.46 61.5,74.5 63,76 74,76 76.275,73.725 76.275,59.27 75.725,58.72 75.725,53.65 v1(76.175,53.2)
ENB_DA1: DA5.7 DA17.6 | length 38.6
  Top Layer w0.254: v1(43.725,85.769) 43.725,86.574 DA17.6@43.725,87 ; v1(49,77.974) 49.5,77.474 49.5,73.968 50.338,73.131 50.338,64.332 49.987,63.981 49.987,55.086 50.052,55.013 52.245,52.57 DA5.7@52.682,52.57
  Bottom Layer w0.254: v1(43.725,85.769) 43.725,83.249 v1(49,77.974)
ENB_DA1n: DA5.2 XP1.17 | length 8.5
  Top Layer w0.254: DA5.2@58.106,52.57 61.07,52.57 XP1.17@65,56.5
ENB_DU: DA23.7 DA36.6 | length 71.1
  Top Layer w0.254: DA36.6@149.5,30.775 147.272,28.547 147.272,25.418 148.562,24.127 156.523,24.127 173,40.604 173,56 167,62 167,66.574 167.149,66.723 168.831,66.723 169.533,67.425 DA23.7@169.533,67.862
ENB_DUn: DA23.2 XP5.17 | length 69.7
  Top Layer w0.254: DA23.2@169.533,62.438 169.533,61.467 177.5,53.5 177.5,23 180.5,20 199.25,20 v1(200.5,21.25)
  Bottom Layer w0.254: v1(200.5,21.25) XP5.17@200.5,23.5
ENB_RgF: DA6.7 DD2.12 DD3.5 | length 76.3
  Top Layer w0.254: DD3.5@112.057,79.5 113.557,78 v1@134.22,78 ; DA6.7@155.998,67.612 v1(155.998,70.237) ; v1(160.5,73.25) 161,73.25 163.385,70.865 163.385,56.319 163.427,56.277 163.427,55.254 DD2.12@163.385,55.212
  Bottom Layer w0.254: v1(134.365,78.145) 147.105,78.145 152,73.25 156.38,73.25 ; v1(155.998,70.237) 156.064,70.303 156.064,70.905 156.38,71.221 156.38,73.25 ; v1(160.5,73.25) 156.38,73.25
ENB_RgFn: DA6.2 XP1.18 | length 101.9
  Top Layer w0.254: v1(70.5,55) 70.5,51.549 71.496,50.553 71.496,49.424 71.67,49.25 72.011,49.25 72.165,49.096 134.059,49.096 139.309,54.346 143.763,54.346 147.572,58.155 154.929,58.155 155.922,59.149 155.922,61.404 155.922,62.112 DA6.2@155.998,62.188
  Bottom Layer w0.254: XP1.18@67,56.5 69,56.5 v1(70.5,55)
ENS: DA9.7 DD4.1 | length 20.8
  Top Layer w0.254: DD4.1@48.92,40.969 48.92,39.42 53.8,34.54 53.8,29.366 58.536,24.63 DA9.7@58.973,24.63
ENSn: DA9.2 XP1.16 | length 36.8
  Top Layer w0.254: DA9.2@64.835,24.63 69.356,29.151 69.356,29.186 69.5,29.33 69.5,56 XP1.16@67,58.5
F2: DA34.9 DD2.2 | length 27.8
  Top Layer w0.254: DA34.9@144.642,35.15 144.575,35.218 144.575,46.075 147,48.5 158.638,48.5 159.007,48.869 159.007,49.131 159.156,49.279 159.392,49.279 159.575,49.462 DD2.2@159.575,49.788
F3: DA34.1 DD2.3 | length 40.5
  Top Layer w0.254: DA34.1@135.752,29.726 135.752,31.937 135.968,32.152 v1(135.968,32.245) ; v1(138.516,37.766) 138.45,37.832 138.45,41.8 147.59,50.94 160.696,50.94 160.845,50.791 DD2.3@160.845,49.788
  Bottom Layer w0.254: v1(135.968,32.245) 135.968,32.339 136.393,32.765 136.393,35.643 v1(138.516,37.766)
F4: DA34.16 DD2.4 | length 38.2
  Top Layer w0.254: v1(135.523,40.847) 136.697,40.847 147.35,51.5 161.547,51.5 162.115,50.932 DD2.4@162.115,49.788 ; v1(135.624,36.468) 135.688,36.404 135.688,35.214 DA34.16@135.752,35.15
  Bottom Layer w0.254: v1(135.523,40.847) 135.574,40.796 135.574,36.519 v1(135.624,36.468)
F5: DA29.9 DD2.5 | length 77.8
  Top Layer w0.254: DA29.9@101.555,28.288 101.555,28.726 102.134,29.304 102.134,29.577 v1(102.75,30.193) ; v1(102.75,37.752) 107.625,42.627 137.652,42.627 147.029,52.004 161.755,52.004 162.619,51.14 162.619,50.992 163.385,50.226 DD2.5@163.385,49.788
  Bottom Layer w0.254: v1(102.75,30.193) v1(102.75,37.752)
F6: DA29.8 DD2.6 | length 74.6
  Top Layer w0.254: v1(101.5,35.055) 101.527,35.027 101.527,33.74 DA29.8@101.555,33.712 ; v1(101.551,37.677) 107.005,43.131 137.306,43.131 146.683,52.508 161.964,52.508 163.47,51.002 163.601,51.002 164.087,50.516 164.087,50.446 164.236,50.297 164.472,50.297 164.655,50.114 DD2.6@164.655,49.788
  Bottom Layer w0.254: v1(101.5,35.055) 101.525,35.08 101.525,37.601 101.5,37.626 v1(101.551,37.677)
F7: DA29.1 DA29.16 DD2.7 | length 76.8
  Top Layer w0.254: DA29.16@110.445,28.288 110.445,28.725 109.945,29.226 109.945,32.775 110.445,33.274 DA29.1@110.445,33.712 110.472,33.74 110.472,35.222 v1(110.5,35.25) ; v1(111.993,45.25) 123.343,45.25 123.445,45.148 138.61,45.148 146.474,53.012 146.587,53.012 146.591,53.016 162.857,53.016 165.357,50.516 165.357,50.446 165.506,50.297 165.742,50.297 165.925,50.114 DD2.7@165.925,49.788
  Bottom Layer w0.254: v1(110.5,35.25) 110.5,35.8 111.722,37.022 111.722,44.979 v1(111.993,45.25)
GN: C87.1 C89.1 C91.2 C92.1 C93.2 DA35.5 R87.2 | length 26.3
  Top Layer w0.5: C91.2@210.775,62.176 C93.2@213.229,62.176 213.529,62.176 213.902,62.549 213.902,62.84 215.505,64.443 215.505,64.803 215.878,65.176 220.426,65.176 222.25,67 222.25,72.34 v1(222.31,72.4)
  Bottom Layer w0.5: C87.1@215.395,72.25 C92.1@217.731,72.25 220.31,72.25 C89.1@220.46,72.4 v1(222.31,72.4)
  other v2: 215.45,72.396
GND: 2.1 9.NT C13.1 C22.1 C26.1 C27.1 C28.1 C29.1 C31.1 C32.1 C35.2 C36.1 C37.2 C38.1 C40.1 C42.2 C43.2 C44.2 C45.1 C46.1 C47.1 C50.1 C51.2 C60.2 C61.1 C62.1 C63.2 C67.1 C70.2 C71.1 C72.1 C79.1 C80.1 C81.2 C82.1 C84.1 C85.1 C88.2 C91.1 C94.1 C95.2 C97.2 C98.2 C99.1 DA1.4 DA1.5 DA1.8 DA2.4 DA2.5 DA2.8 DA3.4 DA3.5 DA3.8 DA4.4 DA4.5 DA4.8 DA5.8 DA6.8 DA7.4 DA8.8 DA9.8 DA10.8 DA13.1 DA13.3 DA14.1 DA15.1 DA17.2 DA17.3 DA19.5 DA19.11 DA20.3 DA21.3 DA23.8 DA24.8 DA25.4 DA25.5 DA25.8 DA26.4 DA26.5 DA26.8 DA27.2 DA27.3 DA27.6 DA27.7 DA29.5 DA31.4 DA32.6 DA34.5 DA36.3 DD1.7 DD2.8 DD2.13 DD3.7 DD4.7 Designator5.1 KT1.1 R27.2 R29.1 R31.2 R37.1 R63.2 RP2.2 RP2.3 RP3.3 VD1.1 VD2.2 VD3.1 VD4.2 VD8.2 VD9.1 VD12.1 VD13.2 VD21.2 VD22.1 XP4.6 XP6.2 XP6.4 XP6.8 | length 285.5
  Top Layer w0.25: C50.1@17,22.4 17,23.44 v1(17,23.627) ; v1(17.5,62.773) C51.2@17.5,64 ; v1(26,48.273) C43.2@26,49.5 ; v1(28,40.543) C42.2@28,41.77 ; v1(32.392,49.642) 32.392,48.977 32.869,48.5 R37.1@34.5,48.5 ; C36.1@34.254,78.5 34.254,79.54 v1(34.254,79.727) ; C35.2@36.212,78.5 36.212,79.54 v1(36.212,79.727) ; v1(36.5,18.773) C44.2@36.5,20 ; v1(36.5,60.773) C45.1@36.5,62 ; C47.1@36.5,95.745 36.605,95.64 v1(36.605,94.475) DA20.3@38.788,94.475 ; v1(37.756,88.806) 37.851,88.806 38.157,88.5 DA17.2@39.275,88.5 ; 38.2,88.5 38.675,88.025 39.25,88.025 DA17.3@39.275,88 ; v1(41.7,56.31) 41.7,56.215 41.825,56.09 41.825,55.375 42.2,55 C37.2@42.5,55 ; v1(42,40.098) 42.997,41.095 DA19.11@44.212,41.095 ; C46.1@46.5,98 47.54,98 v1(47.727,98) ; v1(48.268,98.745) 48.454,98.745 C38.1@49.495,98.745 ; C40.1@49.5,79.82 50.54,79.82 51,80.279 v1(51,80.32) ; v1(51.248,43.669) 54.34,43.669 56.54,41.469 DD4.7@56.54,40.969 ; v1(51.493,51.3) DA5.8@52.682,51.3 ; DA21.3@53.943,85.788 53.943,86.791 v1(53.943,86.978) ; v1(57.784,23.36) 57.97,23.36 DA9.8@58.973,23.36 ; v1(81.605,32.501) 81.7,32.501 82,32.801 82.465,32.801 82.765,32.501 83.595,32.501 ; C79.1@83.595,31.501 83.595,32.501 ; C80.1@83.595,33.501 83.595,32.501 ; v1(86.45,68.425) 86.472,68.447 86.472,70.558 DA1.5@86.494,70.579 DA1.4@87.764,70.579 ; v1(87.5,43.5) 87.555,43.445 87.555,41.875 87.93,41.5 C71.1@88.23,41.5 ; DA2.8@95.692,70.579 v1(95.692,72.155) ; DA29.5@105.365,33.712 105.365,33.245 106.74,31.87 v1(106.74,31.84) ; DA3.8@109.2,70.579 v1(109.2,72.155) ; DD3.7@114.732,80 114.732,81.807 v1(114.75,81.825) ; DA4.8@122.708,70.579 v1(122.708,72.155) ; v1(122.732,36.347) 122.732,36.252 123,35.984 C84.1@123,34.847 ; C26.1@127.851,105.5 127.851,105.323 128.226,104.948 C22.1@132.946,104.948 132.946,102.761 VD1.1@132.633,102.448 VD2.2@132.633,99.948 ; C27.1@128.946,100 128.997,99.948 VD2.2@132.633,99.948 ; v1(129.23,30.095) 129.325,30.095 129.573,29.847 130.288,29.847 C85.1@130.635,29.5 ; v1(130.673,88.81) 130.86,88.81 DD1.7@131.9,88.81 ; v1(133.811,95.423) 133.811,96.098 133.811,97.598 132.633,98.776 VD2.2@132.633,99.948 ; v1(133.849,74.427) 134.524,73.752 134.524,72.547 134.818,72.253 134.818,71.969 135.19,71.597 DA8.8@135.19,70.649 ; v1(136.351,95.971) 136.351,96.158 DA13.1@136.351,97.16 ; DA34.5@140.832,29.726 140.832,29.289 143.89,26.231 143.97,26.231 144.318,25.883 v1(144.413,25.883) ; v1(142.5,86.169) 142.5,86.355 R63.2@142.5,87.396 ; v1(145.595,68.902) 145.595,67.858 145.741,67.712 DA10.8@146.345,67.712 ; v1(147.949,27.433) 148.015,27.366 148.015,27.268 149.4,25.883 C97.2@149.4,25.583 149.4,27.883 C95.2@149.6,28.083 ; DA36.3@150.5,35.225 150.5,36.187 150.795,36.483 151.92,36.483 152.696,35.706 C99.1@154.34,35.706 154.64,35.706 155.015,36.081 155.015,36.652 156.5,38.137 C98.2@156.5,38.437 156.5,38.625 156.125,39 154.702,39 154.64,38.937 v1(154.64,39) ; DA6.8@154.728,67.612 v1(154.728,68.802)
  Top Layer w0.254: v1(37.5,41.809) 37.566,41.875 37.842,41.875 38.332,42.365 DA19.5@38.788,42.365 ; C13.1@57.788,30.91 57.788,31.035 58.478,31.724 58.478,32.322 58.66,32.504 DA7.4@58.788,32.505 ; KT1.1@79.5,71 82.532,71 82.684,70.848 DA1.8@82.684,70.579 ; v1(99.502,72.932) DA2.5@99.502,70.579 DA2.4@100.772,70.579 ; DA14.1@110.351,94.66 111.133,94.66 111.279,94.514 v1(111.372,94.514) ; v1(113.01,73.005) DA3.5@113.01,70.579 DA3.4@114.28,70.579 ; DA15.1@116.351,94.66 116.351,94.223 116.549,94.025 117.027,94.025 117.404,93.648 v1(117.497,93.648) ; v1(126.518,72.682) DA4.5@126.518,70.579 DA4.4@127.788,70.579 ; R27.2@156.5,88.558 158.2,88.558 158.7,89.058 C28.1@159,89.058 159,86.745 VD3.1@161.5,84.245 ; DD2.13@162.115,55.212 162.115,55.632 162.483,56 v1(162.5,56) ; v1(165.925,51.5) v1(165.925,51.5) 167.193,50.23 167.195,50.23 DD2.8@167.195,49.788 ; v1(168.218,69.25) 168.24,69.227 168.24,67.885 DA23.8@168.263,67.862 ; v1(169.575,44.675) 170.1,45.2 C29.1@170.1,49.529 ; R31.2@173.5,81.065 175.889,81.065 VD9.1@176,80.954 176.067,80.887 VD8.2@179.078,80.887 179.223,80.887 181.536,83.2 C31.1@181.836,83.2 ; DA27.7@180.634,98.71 DA27.6@180.634,99.98 DA27.3@186.058,99.98 ; v1(182,89.75) C67.1@182,91.345 ; C70.2@188.5,96.645 v1(190.025,96.645) ; v1(193.5,89.5) 192.097,89.5 C72.1@192.038,89.441 191.665,89.814 189.342,89.814 188.407,90.749 188.407,96.738 185.139,96.738 184.918,96.959 184.918,98.008 185.62,98.71 DA27.2@186.058,98.71 DA27.3@186.058,99.98 ; DA25.4@194.536,43.34 DA25.5@194.536,44.61 193.678,44.61 193.01,45.278 193.01,47.752 193.678,48.42 DA25.8@194.536,48.42 194.575,48.459 v1(194.575,49.5) ; DA24.8@194.698,61.806 194.118,61.806 193.967,61.957 193.967,65.219 193.381,65.805 193.381,69.582 194.049,70.25 DA26.4@194.907,70.25 DA26.5@194.907,71.52 194.049,71.52 193.381,72.188 193.381,74.662 194.049,75.33 DA26.8@194.907,75.33 v1(196.802,75.33) ; DA31.4@196.212,103.781 195.774,103.781 195.072,104.483 190.06,104.483 188.315,102.739 188.315,101.801 186.495,99.98 DA27.3@186.058,99.98 ; v1@208.755,65 208.849,65 209.025,65.176 C91.1@210.775,65.176 ; C82.1@209.895,84.55 210.137,84.309 v1(211.25,84.309) ; C88.2@213.768,76.897 214.068,76.897 214.51,77.339 216.88,77.339 217.029,77.19 DA32.6@217.029,76.038 ; v1(214.704,75.441) v1@214.704,75.535 ; C81.2@221.495,83.65 221.5,83.645 v1(221.5,82.224)
  Top Layer w0.5: v1(169.861,82.132) 169.861,81.205 R29.1@170,81.065 ; v1(213.712,75.535) C88.2@213.712,76.841 ; C88.2@214.441,76.524 214.441,75.797 v1@214.704,75.535
  Top Layer w1: RP2.3@37.04,72.04 39.946,72.04 40.22,72.314 40.874,72.314 42.067,73.506 RP3.3@42.1,73.506
  Bottom Layer w0.5: 213.923,24.827 C60.2@219.415,24.827 219.956,24.827 220.836,23.947 XP6.4@225.209,23.947 ; 214.327,30.327 C62.1@219.415,30.327 221.429,30.327 XP6.8@225.209,34.107 ; XP6.2@225.076,19 XP6.2@225.209,18.867
  Bottom Layer w1: 213.5,19 XP6.2@225.076,19
  other v1: 36.257,23.164 45.257,23.164 48.257,23.164 51.257,23.164 54.257,23.164 36.257,26.164 39.257,26.164 42.257,26.164 45.257,26.164 48.257,26.164 51.257,26.164 54.257,26.164 33.257,29.164 36.257,29.164 45.257,29.164 48.257,29.164 51.257,29.164 56.5,31.41 33.257,32.164 42.257,32.164 45.257,32.164 48.257,32.164 51.257,32.164 57.088,32.502 27.257,35.164 33.257,35.164 39.257,35.164 42.257,35.164 45.257,35.164 48.257,35.164 36.257,38.164 33.257,41.164 42.257,41.164 27.257,44.164 27.257,47.164 24.257,50.164 27.257,50.164 33.257,50.164 36.257,50.164 27.257,53.164 36.257,53.164 42.257,53.164 48.257,53.164 24.257,56.164 27.257,56.164 30.257,56.164 36.257,56.164 39.257,56.164 48.257,56.164 24.257,59.164 36.257,59.164 39.257,59.164 48.257,59.164 21.257,62.164 24.257,62.164 27.257,62.164 30.257,62.164 39.257,62.164 48.257,62.164 208.75,65 30.257,65.164 33.257,65.164 36.257,65.164 42.257,65.164 27.257,68.164 30.257,68.164 33.257,68.164 36.257,68.164 42.257,68.164 45.257,68.164 27.257,71.164 30.257,71.164 36.257,71.164 42.257,71.164 45.257,71.164 27.257,74.164 41.171,76.046 18.257,77.164 21.257,77.164 24.257,77.164 27.257,77.164 33.257,77.164 36.257,77.164 42.257,77.164 45.257,77.164 130.173,100 128.946,104.948
GNDN: C11.1 C12.1 C17.1 C18.1 C52.1 DA1.9 DA2.9 DA3.9 DA4.9 DA5.4 DA6.4 DA7.8 DA8.9 DA9.4 DA10.4 DA23.4 DA24.9 DA25.9 DA26.9 KT2.1 XP1.3 XP1.12 XP1.15 XP5.8 XP5.11 XP5.14 | length 304.3
  Top Layer w0.7: v1(60.139,54.924) 60.046,54.924 59.86,55.11 DA5.4@58.106,55.11 58.106,56.898 C11.1@58.226,57.017 58.226,57.142 59.584,58.5 61.448,58.5 ; v1(64,48.844) 64,37.826 64.212,37.614 v1(64.212,37.52) DA7.8@64.212,36.315 ; DA9.4@64.397,27.17 64.785,27.17 65.29,27.675 65.66,27.675 67.5,29.515 67.5,37 v1(67,37.5) ; DA9.4@64.94,27.325 64.94,28.875 C17.1@65.064,29 ; XP1.15@65,58.5 61.448,58.5 ; XP1.3@65,70.5 61.772,70.5 61.448,70.824 ; v1(74.409,62.5) v1@74.5,62.409 ; DA1.9@82.625,60.724 82.625,59.85 v1(81.625,58.85) 79.504,58.85 KT2.1@79.45,58.795 79.345,58.9 77.6,58.9 74.5,62 v1@74.5,62.409 ; v1(95.692,58.875) DA2.9@95.692,61.523 ; v1(109.2,58.87) DA3.9@109.2,61.523 ; v1(122.708,58.941) DA4.9@122.708,61.523 ; v1(135.19,58.876) DA8.9@135.19,61.593 ; v1(150.155,60.905) DA10.4@150.155,62.288 ; DA10.4@150.155,62.004 150.338,61.821 150.861,61.821 150.932,61.75 C18.1@152,61.75 ; v1(158.538,60.871) DA6.4@158.538,62.188 160.305,62.188 C12.1@160.338,62.155 C12.1@160.213,62.155 ; v1(172.073,60.852) DA23.4@172.073,62.05 ; DA23.4@172.073,62.438 DA23.4@172.073,62.05 ; C52.1@173.668,61.875 173.518,62.025 172.485,62.025 172.098,62.025 DA23.4@172.073,62.05 ; v1(183,75.33) DA26.9@185.851,75.33 ; v1(183.019,61.806) DA24.9@185.642,61.806 ; v1(183.059,48.42) DA25.9@185.48,48.42 ; XP5.8@190.5,25.5 191.75,26.75 195.25,26.75 XP5.14@196.5,25.5 XP5.11@194.5,23.5 ; 61.448,58.5 61.448,70.824 ; 61.448,70.824 61.448,72.625 63.323,74.5 73.457,74.5 74.5,73.457 v1@74.5,62.409
  Bottom Layer w0.7: v1(60.139,54.924) 60,54.785 60,52.844 v1(64,48.844) ; v1(64.212,37.52) 66.98,37.52 v1(67,37.5) ; XP1.12@67,62.5 v1(74.409,62.5) ; v1(81.625,58.85) 81.633,58.858 95.675,58.858 v1(95.692,58.875) ; v1@95.708,58.858 109.188,58.858 v1(109.2,58.87) ; v1@109.2,58.858 v1@122.791,58.858 ; v1(122.708,58.941) v1@122.791,58.858 ; v1(135.19,58.876) v1@135.172,58.858 ; v1@150.155,60.827 v1@158.583,60.827 ; v1(150.155,60.905) 150.078,60.905 150,60.827 147.076,60.827 145.107,58.858 v1@135.172,58.858 ; v1(158.538,60.871) v1@158.583,60.827 ; v1(183,75.33) v1@183,61.787 ; v1(183.019,61.806) v1@183,61.787 ; v1(183.059,48.42) v1@183,48.361 ; XP5.8@190.5,25.5 190.5,28.75 183,36.25 v1@183,48.361 ; v1@122.791,58.858 v1@135.172,58.858 ; v1@158.583,60.827 172.098,60.827 v1(172.073,60.852) 182.895,60.852 183,60.956 ; v1@183,48.361 183,60.956 ; 183,60.956 v1@183,61.787
GNDZ: C21.1 DA11.5 DA12.3 R63.1 RP1.2 RP1.3 VD21.1 VD22.2 XP2.2 | length 78
  Top Layer w0.5: RP1.3@92.446,101.923 RP1.2@94.986,101.923 95.971,101.923 96.809,101.085 97.446,100.448 99.178,100.448 99.202,100.473 99.862,100.473 100.236,100.846 C21.1@99.986,100.846 ; C21.1@100.284,100.846 100.657,100.473 100.657,100.236 DA11.5@102.541,100.236 102.541,100.674 104.715,102.848 v1(106,102.848) ; v1(111.5,102.741) 112.436,102.741 112.667,102.51 113.51,102.51 XP2.2@118,107 119.5,105.5 121.795,105.5 123.795,107.5 126.073,107.5 126.366,107.207 126.366,103.307 127.5,102.172 127.5,100.88 127.176,100.555 127.176,100.095 125.081,98 DA12.3@125.081,95.736 125.109,95.708 125.109,94.573 125.23,94.452 125.23,92.09 126.597,90.723 127.072,90.723 127.074,90.721 127.737,90.721 127.74,90.723 131.66,90.723 133.851,88.532 v1(133.851,88.042) ; VD21.1@136.907,82.5 VD22.2@136.907,84.986 137.088,85.167 137.572,85.167 139.5,87.096 R63.1@139.5,87.396
  Bottom Layer w0.5: v1(106,102.848) 106.054,102.795 111.446,102.795 v1(111.5,102.741) ; v1(133.851,88.042) VD22.2@136.907,84.986
INF: R14.1 R32.1 XP2.1 | length 109.9
  Top Layer w0.254: R32.1@34.621,98.986 34.833,98.774 35.361,98.774 37.373,100.787 39.708,100.787 39.875,100.953 87.453,100.953 95.677,109.177 119.323,109.177 120.443,108.057 120.443,107.097 XP2.1@120.54,107 121.759,108.219 137.689,108.219 R14.1@137.986,107.923
LIMIT: DA10.7 DD1.2 | length 29.9
  Top Layer w0.254: DD1.2@131.9,82.46 v1(133.323,82.46) ; v1(147.537,70.35) 147.576,70.311 147.576,67.751 DA10.7@147.615,67.712
  Bottom Layer w0.254: v1(133.323,82.46) 133.323,77.177 133.5,77 146.75,77 147.615,76.135 147.615,70.569 147.603,70.557 147.603,70.416 v1(147.537,70.35)
LIMITn: DA10.2 XP1.20 | length 92.6
  Top Layer w0.254: v1(72,52.5) 72,49.974 72.374,49.6 133.85,49.6 139.1,54.85 143.554,54.85 147.615,58.911 DA10.2@147.615,62.288
  Bottom Layer w0.254: XP1.20@67,54.5 67,52.507 67.149,52.358 71.765,52.358 71.906,52.5 v1(72,52.5)